# EAGLE board rfid_v2 (EAGLE 6.5.0)
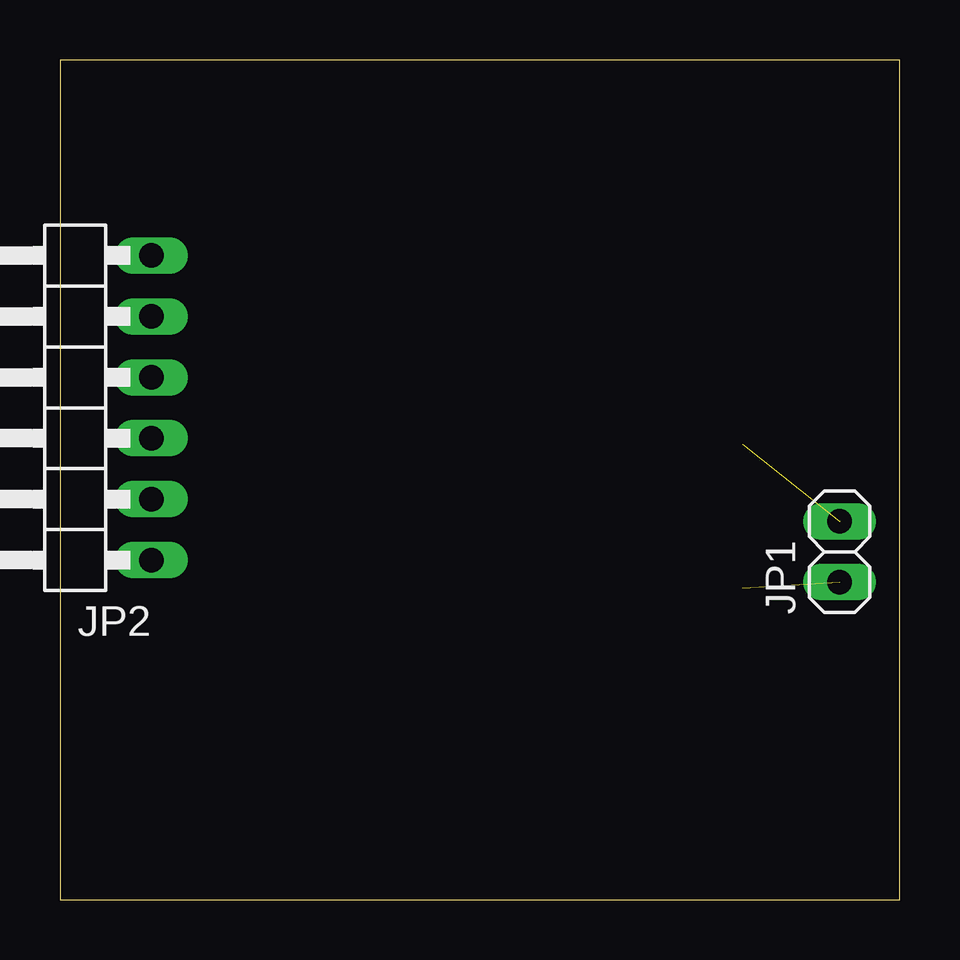
[diagram p0: board, top side]
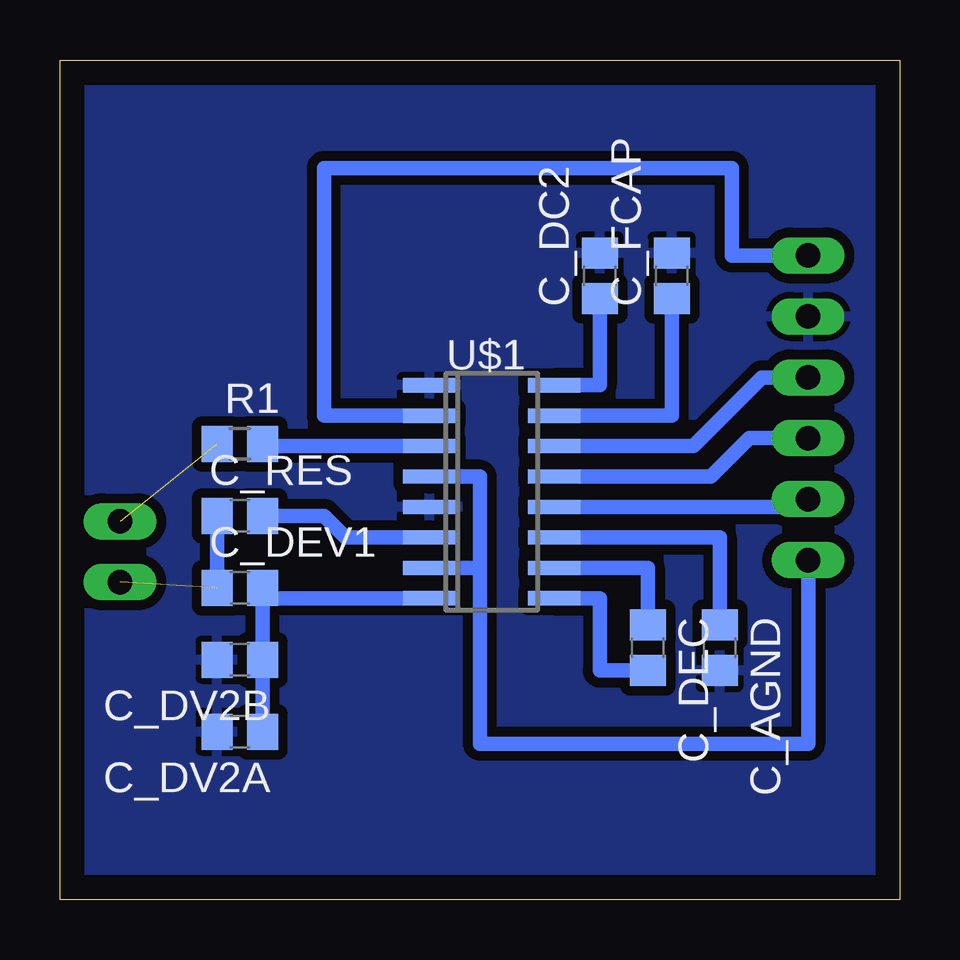
[diagram p1: board, bottom side, seen from below]

Size 35 x 35 mm. Coordinates in mm from the lower left corner, seen from the top.
Outline: 0,0 35,0 35,35 0,35 0,0
Copper layers (1*16): Top 0.035mm / dielectric 1.5mm / Bottom 0.035mm
Design rules "default": minimum track width 10mil, minimum drill 24mil, track to track 8mil, track to pad 8mil, pad to pad 8mil, via to via 8mil, smd to smd 8mil, copper to edge 40mil, drill to drill 8mil, minimum pad ring 10mil, minimum via ring 8mil, stop-mask expansion 4mil, vias tented up to drill 0mil, thermal gap 10mil

## Footprints (pad centres in the part's own frame; a part is rotated, then mirrored left to right if it is on the bottom)
C0805 = smd 1.3 x 1.5: 1 -0.95,0; 2 0.95,0
1X02 = drill 1.016 long: 1 -1.27,0; 2 1.27,0
1X06/90 = drill 1.016 long: 1 -6.35,-3.81; 2 -3.81,-3.81; 3 -1.27,-3.81; 4 1.27,-3.81; 5 3.81,-3.81; 6 6.35,-3.81
R0805 = smd 1.3 x 1.5: 1 -0.95,0; 2 0.95,0
SO16 = smd 0.6 x 2.2: 1 -4.445,-2.6; 2 -3.175,-2.6; 3 -1.905,-2.6; 4 -0.635,-2.6; 5 0.635,-2.6; 6 1.905,-2.6; 7 3.175,-2.6; 8 4.445,-2.6; 9 4.445,2.6; 10 3.175,2.6; 11 1.905,2.6; 12 0.635,2.6; 13 -0.635,2.6; 14 -1.905,2.6; 15 -3.175,2.6; 16 -4.445,2.6

## Placement (x,y rotation side)
C_AGND  100n  [C0805]  7.5,10.5 270 bottom
C_DC2  10n  [C0805]  12.5,26 90 bottom
C_DEC  100n  [C0805]  10.5,10.5 270 bottom
C_DEV1  4p7  [C0805]  27.5,13 0 bottom
C_DV2A  1n0  [C0805]  27.5,7 180 bottom
C_DV2B  470p  [C0805]  27.5,10 180 bottom
C_FCAP  10n  [C0805]  9.5,26 90 bottom
C_RES  3n3  [C0805]  27.5,16 0 bottom
JP1  [1X02]  32.5,14.5 90 top
JP2  [1X06/90]  0,20.5 90 top
R1  33R  [R0805]  27.5,19 0 bottom
U$1  EM4095_MOD  [SO16]  17,17 270 bottom

## Library data of the parts
C_AGND C_DC2 C_DEC C_DEV1 C_DV2A C_DV2B C_FCAP C_RES R1 = rcl
JP1 JP2 = pinhead
U$1 = em-microelectronic

## Nets
+5V: JP2.1 U$1.4 U$1.7
DMOD_OUT: JP2.3 U$1.13
GND: C_AGND.2 C_DC2.2 C_DV2A.2 C_DV2B.2 C_FCAP.2 JP2.5 U$1.1 U$1.5
MOD: JP2.2 U$1.12
N$1: C_DEV1.2 C_DV2A.1 C_DV2B.1 U$1.8
N$2: C_RES.2 U$1.6
N$3: JP1.2 R1.1
N$4: R1.2 U$1.3
N$5: C_DEV1.1 C_RES.1 JP1.1
N$6: C_DEC.1 U$1.10
N$7: C_DEC.2 U$1.9
N$8: C_AGND.1 U$1.11
N$12: C_DC2.1 U$1.16
N$13: C_FCAP.1 U$1.15
RDY/CLK: JP2.6 U$1.2
SHD: JP2.4 U$1.14

## Tracks (layer width: path | path; a pad name or v marks a point on that pad's centre or on a via)
+5V
  Bottom 0.61: U$1.7 17.5,13.82 | 17.5,13.82 17.5,17.64 U$1.4 | JP2.1 3.81,6.5 17.5,6.5 17.5,13.82
DMOD_OUT
  Bottom 0.61: U$1.13 7.87,17.64 6.27,19.23 JP2.3
GND
  pour Bottom (isolate 0.406): 0,35 35,35 35,0 0,0
MOD
  Bottom 0.61: U$1.12 4.13,16.36 JP2.2
N$1
  Bottom 0.61: U$1.8 26.11,12.55 C_DEV1.2 C_DV2B.1 C_DV2A.1
N$2
  Bottom 0.61: U$1.6 23.09,15.1 24,16 C_RES.2
N$3  (1 unrouted)
N$4
  Bottom 0.61: U$1.3 26.45,18.91 R1.2
N$5  (1 unrouted)
  Bottom 0.61: C_DEV1.1 C_RES.1
N$6
  Bottom 0.61: U$1.10 10.5,13.82 C_DEC.1
N$7
  Bottom 0.61: U$1.9 12.5,12.55 12.5,9.55 C_DEC.2
N$8
  Bottom 0.61: U$1.11 7.5,15.1 C_AGND.1
N$12
  Bottom 0.61: C_DC2.1 12.5,21.45 U$1.16
N$13
  Bottom 0.61: U$1.15 9.5,20.18 C_FCAP.1
RDY/CLK
  Bottom 0.61: U$1.2 24,20.18 24,30.5 7,30.5 7,26.85 JP2.6
SHD
  Bottom 0.61: U$1.14 8.6,18.91 5.73,21.77 JP2.4